# EAGLE board motherboard (EAGLE 8.5.0)
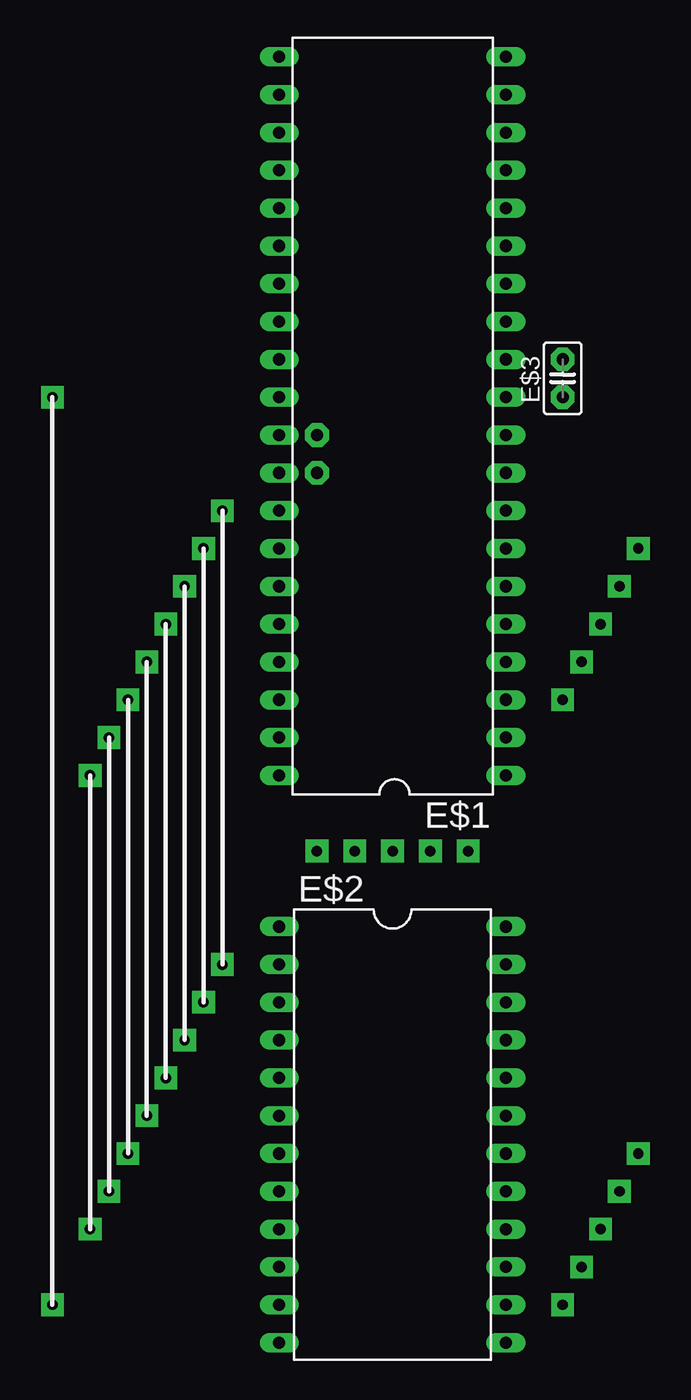
[diagram p0: board, top side]
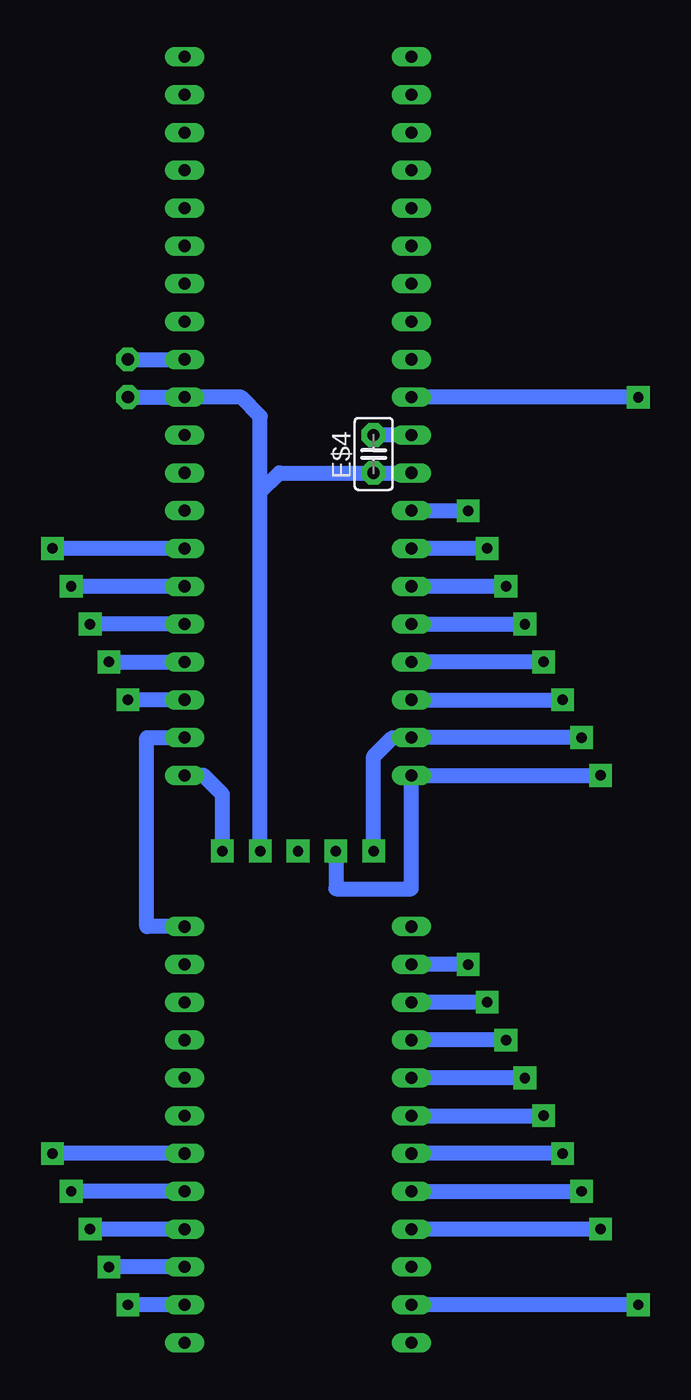
[diagram p1: board, bottom side, seen from below]

No outline drawn. Coordinates in mm, seen from the top.
Copper layers (1*16): Top 0.035mm / dielectric 1.5mm / Bottom 0.035mm
Design rules "default": minimum track width 6mil, minimum drill 0.35mm, track to track 6mil, track to pad 6mil, pad to pad 6mil, via to via 6mil, smd to smd 6mil, copper to edge 40mil, drill to drill 6mil, minimum pad ring 10mil, minimum via ring 8mil, stop-mask expansion 4mil, vias tented up to drill 0mil, thermal gap 10mil

## Footprints (pad centres in the part's own frame; a part is rotated, then mirrored left to right if it is on the bottom)
DIL40 = drill 0.813 long: 1 -24.13,-7.62; 2 -21.59,-7.62; 3 -19.05,-7.62; 4 -16.51,-7.62; 5 -13.97,-7.62; 6 -11.43,-7.62; 7 -8.89,-7.62; 8 -6.35,-7.62; 9 -3.81,-7.62; 10 -1.27,-7.62; 11 1.27,-7.62; 12 3.81,-7.62; 13 6.35,-7.62; 14 8.89,-7.62; 15 11.43,-7.62; 16 13.97,-7.62; 17 16.51,-7.62; 18 19.05,-7.62; 19 21.59,-7.62; 20 24.13,-7.62; 21 24.13,7.62; 22 21.59,7.62; 23 19.05,7.62; 24 16.51,7.62; 25 13.97,7.62; 26 11.43,7.62; 27 8.89,7.62; 28 6.35,7.62; 29 3.81,7.62; 30 1.27,7.62; 31 -1.27,7.62; 32 -3.81,7.62; 33 -6.35,7.62; 34 -8.89,7.62; 35 -11.43,7.62; 36 -13.97,7.62; 37 -16.51,7.62; 38 -19.05,7.62; 39 -21.59,7.62; 40 -24.13,7.62
DIL24-6 = drill 0.813 long: 1 -13.97,-7.62; 2 -11.43,-7.62; 3 -8.89,-7.62; 4 -6.35,-7.62; 5 -3.81,-7.62; 6 -1.27,-7.62; 7 1.27,-7.62; 8 3.81,-7.62; 9 6.35,-7.62; 10 8.89,-7.62; 11 11.43,-7.62; 12 13.97,-7.62; 13 13.97,7.62; 14 11.43,7.62; 15 8.89,7.62; 16 6.35,7.62; 17 3.81,7.62; 18 1.27,7.62; 19 -1.27,7.62; 20 -3.81,7.62; 21 -6.35,7.62; 22 -8.89,7.62; 23 -11.43,7.62; 24 -13.97,7.62
C2.5-2 = drill 0.813 pad 1.6 octagon: 1 -1.27,0; 2 1.27,0

## Placement (x,y rotation side)
E$1  [DIL40]  72.39,69.85 90 top
E$2  [DIL24-6]  72.39,21.59 270 top
E$3  [C2.5-2]  83.82,72.39 90 top
E$4  [C2.5-2]  67.31,67.31 90 bottom

## Library data of the parts
E$1 E$2 = ic-package
E$3 E$4 = capacitor-wima

## Nets
S$1: E$2.2
S$2: E$2.3
S$3: E$2.4
S$4: E$2.5
S$5: E$2.6
S$6: E$2.7
S$7: E$2.8
S$8: E$2.9
S$9: E$1.33
S$10: E$1.34
S$11: E$1.35
S$12: E$1.36
S$13: E$1.37
S$14: E$1.38
S$16: E$1.31 E$4.2
S$17: E$2.11
S$18: E$1.30
S$19: E$1.3
S$20: E$1.2 E$2.24
S$21: E$2.18
S$22: E$2.17
S$23: E$2.16
S$24: E$2.15
S$25: E$2.14
S$26: E$1.4
S$27: E$1.5
S$28: E$1.6
S$29: E$1.7
S$30: E$1.1
S$31: E$1.11 E$1.32 E$3.1
S$33: E$1.40
S$34: E$1.12 E$3.2
S$35: E$1.39

## Tracks (layer width: path | path; a pad name or v marks a point on that pad's centre or on a via)
S$1  (via drill 0.7 pad 1.52)
  Bottom 1.016: v60.96,33.02 E$2.2
S$2  (via drill 0.7 pad 1.52)
  Bottom 1.016: v59.69,30.48 E$2.3
S$3  (via drill 0.7 pad 1.52)
  Bottom 1.016: v58.42,27.94 E$2.4
S$4  (via drill 0.7 pad 1.52)
  Bottom 1.016: v57.15,25.4 E$2.5
S$5  (via drill 0.7 pad 1.52)
  Bottom 1.016: E$2.6 v55.88,22.86
S$6  (via drill 0.7 pad 1.52)
  Bottom 1.016: v54.61,20.32 E$2.7
S$7  (via drill 0.7 pad 1.52)
  Bottom 1.016: E$2.8 v53.34,17.78
S$8  (via drill 0.7 pad 1.52)
  Bottom 1.016: v52.07,15.24 E$2.9
S$9  (via drill 0.7 pad 1.52)
  Bottom 1.016: E$1.33 v60.96,63.5
S$10  (via drill 0.7 pad 1.52)
  Bottom 1.016: v59.69,60.96 E$1.34
S$11  (via drill 0.7 pad 1.52)
  Bottom 1.016: v58.42,58.42 E$1.35
S$12  (via drill 0.7 pad 1.52)
  Bottom 1.016: E$1.36 v57.15,55.88
S$13  (via drill 0.7 pad 1.52)
  Bottom 1.016: v55.88,53.34 E$1.37
S$14  (via drill 0.7 pad 1.52)
  Bottom 1.016: E$1.38 v54.61,50.8
S$16
  Bottom 1.016: E$1.31 E$4.2
S$17  (via drill 0.7 pad 1.52)
  Bottom 1.016: v49.53,10.16 E$2.11
S$18  (via drill 0.7 pad 1.52)
  Bottom 1.016: v49.53,71.12 E$1.30
S$19  (via drill 0.7 pad 1.52)
  Bottom 1.016: E$1.3 v83.82,50.8
S$20
  Bottom 1.016: E$2.24 82.55,35.56 82.55,48.26 E$1.2
S$21  (via drill 0.7 pad 1.52)
  Bottom 1.016: E$2.18 v88.9,20.32
S$22  (via drill 0.7 pad 1.52)
  Bottom 1.016: E$2.17 v87.63,17.78
S$23  (via drill 0.7 pad 1.52)
  Bottom 1.016: E$2.16 v86.36,15.24
S$24  (via drill 0.7 pad 1.52)
  Bottom 1.016: E$2.15 v85.09,12.7
S$25  (via drill 0.7 pad 1.52)
  Bottom 1.016: E$2.14 v83.82,10.16
S$26  (via drill 0.7 pad 1.52)
  Bottom 1.016: v85.09,53.34 E$1.4
S$27  (via drill 0.7 pad 1.52)
  Bottom 1.016: E$1.5 v86.36,55.88
S$28  (via drill 0.7 pad 1.52)
  Bottom 1.016: E$1.6 v87.63,58.42
S$29  (via drill 0.7 pad 1.52)
  Bottom 1.016: E$1.7 v88.9,60.96
S$30  (via drill 0.7 pad 1.52)
  Bottom 1.016: v77.47,40.64 77.47,44.45 78.74,45.72 E$1.1
S$31  (via drill 0.7 pad 1.52)
  Bottom 1.016: v74.93,40.64 74.93,64.77 | 74.93,64.77 73.66,66.04 E$1.32 | 74.93,64.77 74.93,69.85 76.2,71.12 E$1.11 E$3.1
S$32  (via drill 0.7 pad 1.52)
  other vias: 72.39,40.64
S$33  (via drill 0.7 pad 1.52)
  Bottom 1.016: v69.85,40.64 69.85,38.1 64.77,38.1 E$1.40 v52.07,45.72
S$34
  Bottom 1.016: E$3.2 E$1.12
S$35  (via drill 0.7 pad 1.52)
  Bottom 1.016: v67.31,40.64 67.31,46.99 66.04,48.26 E$1.39 v53.34,48.26